# Altium PCB Instrument_droid.PcbDoc (part 2 of 2)
Units mil, origin at the board's own origin, x right, y up, seen from the top; angles counter-clockwise.
Board outline 3674.15 x 2121.53 mil, 4 copper layers (Layer1, Layer2, Layer3, Layer4), stack 23.756 mil thick; 87 components, 48 nets, 303 pads, 89 vias.
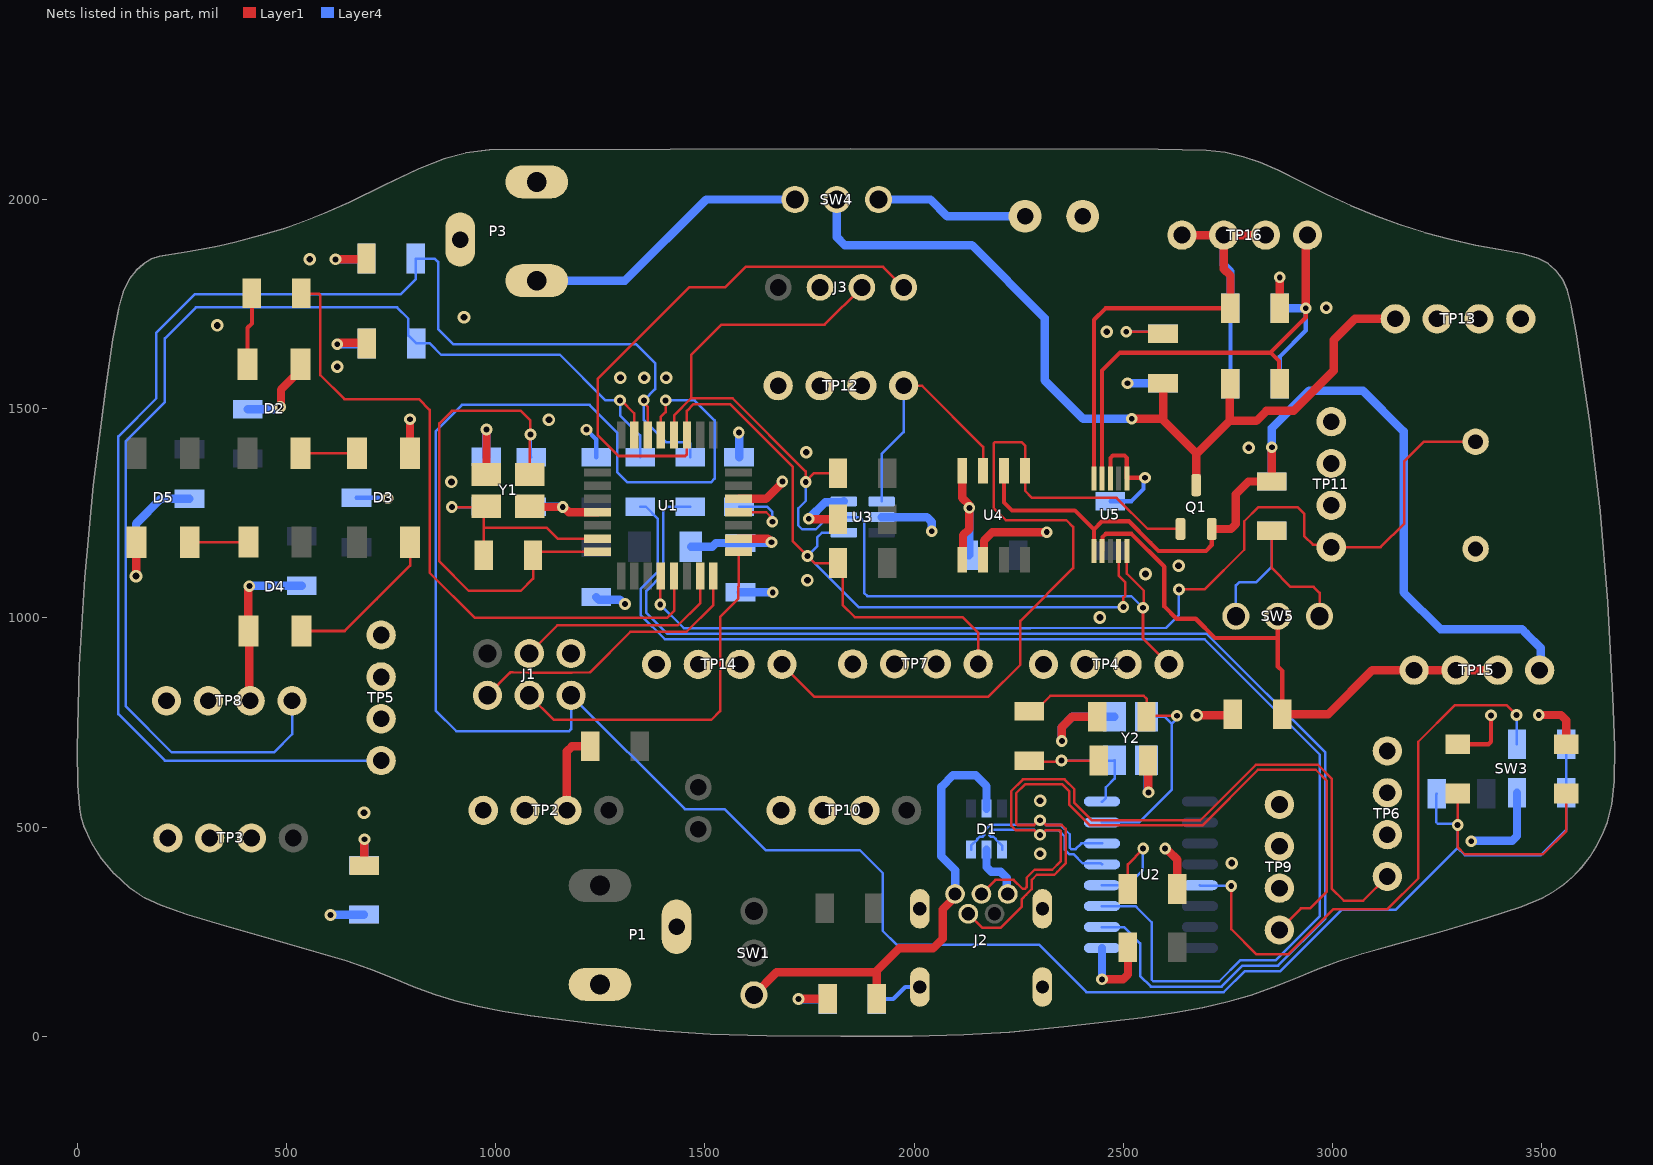
[diagram p4: the nets of this part, all layers, seen from the top]

## Via types
v1: diameter 28, hole 14, Layer1 to Layer4, 66 vias
v2: diameter 30, hole 16, Layer1 to Layer4, 23 vias

## Nets (pads, with @x,y where several pads share a name; then routed paths per layer and width w, separated by ;. In a path a pad name is that pad's centre, name@x,y a point inside that pad or via, vN(x,y) a via of type N, cw(c..) or ccw(c..) an arc to the next point about the centre after c; other vN are vias at no path point) (continued)
+AVCC: C12.2 L1.1 U1.18 | length 279.1
  Layer1 w20: U1.18@1580.43,1189.5 1650.5,1189.5 v1(1659,1181)
  Layer4 w20: L1.1@1466.5,1170 1517,1170 1526,1179 C12.2@1585,1179 1586,1180 1658,1180 v1(1659,1181)
+MOS_D: LED6.1 Q1.3 R15.2 SW4.2 TP13.1 | length 2155.1
  Layer1 w20: v1(2520,1476) 2595,1476 ; LED6.1@2595,1561 2595,1485 2595,1473 2674,1394 ; Q1.3@2674,1317.36 2674,1394 ; R15.2@2756,1560 2754,1558 2754,1471 ; TP13.1@3150,1715 3053.72,1715 3003,1664.28 3003,1591 2907,1495 2842,1495 2818,1471 2754,1471 ; 2674,1394 2677,1394 2754,1471
  Layer4 w20: SW4.2@1815,2000 1815,1910 1834,1891 2138,1891 2312,1717 2312,1568 2404,1476 v1(2520,1476)
+USB_VCC: D1.5 J2.1 LED1.1 SW1.3 | length 1209.1
  Layer1 w20: SW1.3@1617,99 1671,153 1911,153 LED1.1@1911,89.5 1911,157 1964,210 2045,210 2068,233 2068,303.09 2097.8,332.88 J2.1@2097.8,340.25
  Layer4 w20: J2.1@2097.8,340.25 2097.8,397.2 2065,430 2065,596 2093,624 2147,624 2173,598 D1.5@2173,544
+VDEVICE: P3.1 SW4.3 | length 697.4
  Layer4 w20: P3.1@1098,1806 1309,1806 1503,2000 SW4.3@1715,2000
+VLOAD: Q1.2 R16.2 R17.2 TP15.1 U4.2 U5.6 | length 2388.3
  Layer1 w10: U4.2@2215,1351.3 2215,1276.21 2234.21,1257 2384,1257 2429.63,1211.37 ; U5.6@2429.63,1160 2429.63,1211.37 ; Q1.2@2711.4,1212.64 2711.4,1174.12 2697.28,1160 2584.22,1160 2564.11,1180.11 2513.22,1231 2449.26,1231 2429.63,1211.37
  Layer1 w20: Q1.2@2711.4,1212.64 2757.28,1212.64 2769,1224.35 2769,1296 2799,1326 R17.2@2855,1326 v1(2855,1408)
  Layer4 w20: R16.2@2855,1326 v1(2855,1408) 2855,1454 2944,1543 3073,1543 3170,1446 3170,1061 3258,973 3453,973 3462.97,963.03 3497.72,928.28 3497.72,877.72 TP15.1@3495,875
+VTERMINAL: P2.1 SW4.1 | length 366.6
  Layer4 w20: SW4.1@1915,2000 2039,2000 2079,1960 P2.1@2265,1960
+VTH: R15.1 R18.2 R19.2 TP16.1 U5.4 | length 1346.7
  Layer1 w10: U5.4@2449.32,1333.23 2449.32,1591.32 2492,1634 2852,1634 ; R15.1@2874,1560 2872.22,1561.78 2872.22,1613.78 2852,1634 ; v1(2936,1740) 2935.89,1739.89 2935.89,1717.89 2913,1695 2852,1634
  Layer1 w20: v1(2936,1740) 2936,1911 TP16.1@2940,1915
  Layer4 w10: R18.2@2874,1560 2874,1625 2936,1687 v1(2936,1740)
  Layer4 w20: R19.2@2874,1740 v1(2936,1740)
-VLOAD: R20.2 SW5.2 TP15.2 U5.7 | length 1411.4
  Layer1 w10: U5.7@2449.32,1160 2450.22,1160.91 2450.22,1193.03 2458.12,1200.94 2519.25,1200.94 2598,1122.18 2598,1027 2626.97,998.03 2672.97,998.03 2719,952 2869,952 ; SW5.2@2869,1004 2869,952 ; R20.2@2880,770 2880,873 2869,884 2869,952
  Layer1 w20: R20.2@2880,770 2990,770 3095,875 TP15.2@3195,875 TP15.2@3295,875 TP15.2@3395,875
-VTH: R18.1 R19.1 R21.2 TP16.2 U5.5 | length 1441.4
  Layer1 w10: U5.5@2429.63,1352.17 2429.63,1712.63 2457,1740 R21.2@2756,1740
  Layer1 w20: TP16.2@2640,1915 TP16.2@2740,1915 ; R21.2@2756,1740 2756,1818 2740,1834 TP16.2@2740,1915 ; TP16.2@2840,1915 TP16.2@2740,1915
  Layer4 w10: R18.1@2756,1560 R19.1@2756,1740
  Layer4 w20: TP16.2@2740,1915 2740,1844 2756,1828 R19.1@2756,1740
AD4/SDA: J3.4 R12.1 TP7.1 U1.27 U3.4 U5.9 | length 3567.6
  Layer1 w6: J3.4@1975,1790 1926,1839 1597,1839 1548,1790 1462,1790 1243.39,1571.39 1243.39,1437 1293.39,1387 1452.49,1387 1456,1390.51 1456,1436.01 U1.27@1457,1437.01 1457,1495 1473,1511 1560,1511 1710,1361 1710,1183 v1(1745,1148) 1762,1131 R12.1@1818,1131 1829,1120 1829,1031 1858,1002 2116,1002 2153,965 TP7.1@2153,890 ; U5.9@2488.68,1160 2488.68,1101.32 2505,1085 2505,1054 2500,1049 v1(2500,1026)
  Layer4 w6: U3.4@1831.92,1203.6 1779.6,1203.6 1768,1192 1768,1171 v1(1745,1148) 1867,1026 v1(2500,1026)
AD5/SCL: J3.3 R13.1 TP4.1 U1.28 U3.5 U5.10 | length 2596.3
  Layer1 w6: U1.28@1426,1437.01 1426,1484 1467,1525 ; R13.1@1818,1346 1761,1346 1741,1326 v1(1741,1325) 1740.52,1325.48 1740.52,1350.28 1565.8,1525 1467,1525 ; J3.3@1875,1790 1786,1701 1540,1701 1467,1628 1467,1525 ; U5.10@2508.37,1160 2508.37,1105.63 2549,1065 2549,1026 v1@2547.06,1024.06 ; v1(2546.86,1024.26) 2547,1024.12 2547,951 TP4.1@2609,889
  Layer4 w6: v1(1741,1325) 1741,1280 1723,1262 1723,1221 1732,1212 1765,1212 1794,1241 U3.5@1831.92,1241 1870,1241 1880.39,1230.61 1880.39,1059.61 1888,1052 2519,1052 2546.74,1024.26 v1(2546.86,1024.26)
AREF: C9.2 U1.20 | length 202.5
  Layer1 w6: U1.20@1580.43,1252.5 1646.5,1252.5 1661,1238 v1(1661,1230)
  Layer4 w6: C9.2@1581.5,1266 1648,1266 1661,1253 v1(1661,1230)
CXTAL1: C4.2 R2.1 U2.7 Y2.1 | length 863.9
  Layer1 w6: R2.1@2275,777 2288.5,777 2325.5,814 2548.41,814 2555.38,807.04 C4.2@2555.38,763.94 2557.44,766 v1(2628,766)
  Layer4 w6: U2.7@2449,511 2537,511 2616,590 2616,746 ; Y2.1@2555.38,763.94 2598.06,763.94 2616,746 ; v1(2628,766) 2628,760.05 2616,748.05 2616,746
CXTAL2: C6.2 R2.2 U2.8 Y2.3 | length 407.9
  Layer1 w6: R2.2@2275,659 2278,656 2349,656 v1(2352,659) C6.2@2441,659
  Layer4 w6: v1(2352,659) 2478,659 Y2.3@2479,660 2479,616 2458.24,595.24 2458.24,569.31 2449.93,561 U2.8@2449,561
D+: D1.1 J2.3 TP6.1 U2.5 | length 2270.9
  Layer1 w6: J2.3@2160.78,340.25 2194.41,373.88 2237.7,373.88 2259.54,352.04 2264.51,352.04 2269,356.53 2269,379 2288,398 2330,398 2350,418 2350,490.9 2347.9,493 2315.51,493 2304.01,481.5 v1(2301,481.5) 2297.99,481.5 2286.49,493 2242.54,493 2232,503.54 2232,585.97 2260.03,614 2359.46,614 2383,590.46 2383,557.97 2424.97,516 2683.86,516 2816.86,649 2964.97,649 2998,615.97 2998,353 3027,324 3073,324 TP6.1@3131,382
  Layer4 w6: D1.1@2210,446 2210,455.5 2195,470.5 2195,471.64 2189.14,477.5 2182.51,477.5 2179,481.01 2179,485.99 2186.37,493.35 2286.49,493.35 2298.34,481.5 2304.01,481.5 2315.51,493 2345,493 2360,478 2360,446.09 2370.54,435.54 2380.46,435.54 2402.5,413.5 2446.5,413.5 U2.5@2449,411
D-: D1.3 J2.2 TP9.1 U2.6 | length 2321.8
  Layer1 w6: J2.2@2129.28,292.86 2162.91,259.24 2206.2,259.24 2257.4,310.44 2257.4,327.96 2268.02,338.58 2281,351.56 2281,374.03 2292.97,386 2334.97,386 2342,393.03 2354.97,406 2362,413.03 2362,495.87 2352.87,505 2315.51,505 2304.01,516.5 v1(2301,516.5) 2297.99,516.5 2286.49,505 2247.51,505 2244,508.51 2244,581 2265,602 2354.49,602 2371,585.49 2371,553 2396,528 2420,504 2688.83,504 2821.83,637 2960,637 2986,611 2986,345 2946.62,305.62 2924.62,305.62 TP9.1@2873,254
  Layer4 w6: D1.3@2136,446 2136,455.5 2151,470.5 2151,471.64 2156.86,477.5 2163.49,477.5 2167,481.01 2167,490.96 2181.4,505.35 2286.49,505.35 2295.13,514 2298.5,514 v1(2301,516.5) 2304.01,516.5 2315.51,505 2349.97,505 2372,482.97 2372,451.06 2375.51,447.54 2386.06,447.54 2399.51,461 U2.6@2449,461
DAC_OUT: TP12.1 U3.1 U4.3 | length 606.7
  Layer1 w6: TP12.1@1975,1555 2019,1555 2165,1409 U4.3@2165,1351.3
  Layer4 w6: U3.1@1922.08,1278.4 1922.08,1391.31 1975,1444.23 TP12.1@1975,1555
DTR: C7.2 U2.13 | length 1402.8
  Layer1 w6: v1(2758,359) 2758,256 2817.51,196.49 2895.2,196.49 3002.72,304 3131.54,304 3205,377.46 3205,704 3292,791 3417,791 v1(3440,768)
  Layer4 w6: U2.13@2683,361 2684,360 2757,360 v1(2758,359) ; v1(3440,768) 3440.84,767.16 C7.2@3440.84,698.11
GND: BZ1.2 C1.1 C3.1 C4.1 C5.1 C6.1 C8.1 C9.1 C10.1 C11.1 C12.1 C13.1 C14.1 C15.1 C16.1 C17.1 C18.1 C19.1 C20.1 C21.1 D1.2 D2.3 D3.3 D4.3 D5.3 J1.6 J2.5 J2.6 J2.7 J2.8 J2.9 J3.2 P1.2 P1.3 P2.2 P3.2 P3.3 R4.1 R5.1 R14.1 R20.1 R21.1 SW3.3 SW3.4 TP2.2 TP3.2 TP4.2 TP5.2 TP6.2 TP7.2 TP8.2 TP9.2 TP10.2 TP11.2 TP12.2 TP13.2 TP14.2 U1.5 U1.21 U2.1 U3.2 U3.6 U4.4 U4.5 U4.6 U5.1 U5.3 Y1.2 Y1.4 Y2.2 Y2.4 | length 5176.3
  Layer1 w10: U5.3@2469,1333.23 2469,1382.14 2474.86,1388 2502.51,1388 2508.37,1382.14 U5.1@2508.37,1333.23 2508.37,1334.09 2509.28,1335 v1(2552,1335) ; SW3.4@3299,698.11 3373.11,698.11 3379,704 v1(3379,767)
  Layer1 w20: v2(140,1100) 140.75,1100.75 140.75,1180.35 D5.3@141.5,1181.1 ; v1(411,1076) 408.5,1073.5 D4.3@408.5,968.7 410.75,966.45 410.75,804.25 TP8.2@413,802 ; v1(485,1504) 486.53,1505.53 486.53,1545.68 533.5,1592.65 D2.3@533.5,1606.3 ; D3.3@795,1393.7 v1(795,1475) ; Y1.4@977.53,1343.22 977.9,1343.58 v1(977.9,1450.27) ; Y1.2@1081.47,1266.84 1083.31,1265 v1(1160,1265) 1162.16,1265 1174.66,1252.5 U1.5@1243.43,1252.5 ; TP2.2@1170,540 1170,681.28 1181.72,693 C1.1@1226,693 ; U1.21@1580.43,1284.5 1645.5,1284.5 1685,1324 v1(1685,1326) ; v1(1748,1237) 1749,1236 C18.1@1818,1236 ; U4.5@2115,1138.7 2116.81,1140.51 2116.81,1197.81 2132,1213 v1(2132,1263) 2132,1270 2115,1287 U4.4@2115,1351.3 ; U4.6@2165,1138.7 2166.81,1140.51 2166.81,1184.81 2187,1205 v1(2317,1205) ; v1(2353,706) 2353,739 2377.94,763.94 C4.1@2437.38,763.94 ; v1(2449,136) 2499.28,136 2511,147.72 C13.1@2511,213 ; TP4.2@2509,887.39 TP4.2@2509,889 ; C6.1@2559,659 2559.5,658.5 2559.5,583.5 v1(2560,583) ; v1(2600,449) 2605,444 2607,444 2629,422 C14.1@2629,352 ; v2(2676,767) 2759,767 R20.1@2762,770 ; R21.1@2874,1740 v1(2874,1814) ; v1(3493,768) 3546,768 3558.84,755.16 SW3.3@3558.84,698.11
  Layer4 w10: C17.1@667,1287 741,1287 v1(742,1286) ; v1(1217,1450) 1240,1427 C10.1@1240,1384 ; R4.1@1911,89 1950,89 1978.75,117.75 J2.8@2013.55,117.75 ; C20.1@2469,1279 2519.5,1279 2548.56,1308.06 2548.56,1331.56 v1(2552,1335)
  Layer4 w20: v2(140,1100) 140,1225 200,1285 C21.1@268,1285 ; C15.1@407,1499 477.84,1499 482.84,1504 v1(485,1504) ; v1(411,1076) 411.5,1076.5 535.5,1076.5 C16.1@536,1077 ; v1(605,290) 605.5,290.5 684.5,290.5 R5.1@685,291 ; C3.1@977.53,1384.84 977.53,1447.47 975,1450 975.27,1450.27 v1(977.9,1450.27) ; C5.1@1085,1266 1085.5,1265.5 1159.5,1265.5 v1(1160,1265) ; C11.1@1240,1050 1246.64,1043.36 1296.48,1043.36 1306.84,1033 v1(1309,1033) ; v1(1581,1443) 1581.5,1442.5 C9.1@1581.5,1384 ; C12.1@1585,1061 v1(1662,1061) ; v1(1748,1237) 1787.79,1276.79 1830.31,1276.79 U3.6@1831.92,1278.4 ; U3.2@1922.08,1241 2030.28,1241 2042,1229.28 v1(2042,1207) ; C19.1@2131,1150 2131.5,1150.5 2131.5,1262.5 v1(2132,1263) ; D1.2@2173,446 2173,404.72 2184.72,393 2207,393 2221,379 2221,343.03 J2.5@2223.78,340.25 ; v1(2353,706) 2353,739 2377.94,763.94 Y2.4@2479,763.94 ; v1(2449,136) U2.1@2449,211 ; TP4.2@2509,881 TP4.2@2509,889 ; v1(2510,1561) R14.1@2595,1561 ; Y2.2@2555.38,660 2558.47,656.91 2558.47,584.53 v1(2560,583) ; v1(3331.53,466.09) 3332.44,467 3429.28,467 3441,478.72 C8.1@3441,581.89
  other v2: 2759,414 2301,436 685,534 2301,563 2444,1001 1745,1090 2553,1105 2632,1125 894,1325 1742,1396 2800,1407 1127,1474 1298,1574 1355,1574 1407,1574 621,1600 2460,1684 334,1699 924,1719 2985,1741 555,1857
IO0: R8.1 R10.1 TP5.1 U1.30 | length 3515.8
  Layer1 w6: v1(1354,1520) 1354,1514.05 1363,1505.05 U1.30@1363,1437.01
  Layer4 w6: TP5.1@726,659 209,659 98,770 98,1434 189,1525 189,1682 281,1774 773,1774 809,1810 R10.1@809,1859 854,1859 862,1851 862,1691 899,1654 1336,1654 1381,1609 1381,1547 v1(1354,1520) 1354,1473 1407,1420 1461.49,1420 1465,1416.49 R8.1@1465,1384
IO1: R9.1 R11.1 TP8.1 U1.31 | length 2951.5
  Layer1 w6: v1(1297,1520) 1300,1520 1331,1489 U1.31@1331,1437.01
  Layer4 w6: TP8.1@513,802 513,722 469.49,678.49 225.51,678.49 115,789 115,1422 209,1516 209,1668 283,1742 764,1742 791,1715 791,1675 R11.1@810,1656 842.5,1656 869.5,1629 1153,1629 1262,1520 v1(1297,1520) ; v1@1297,1523 1297,1484.02 1345,1436.02 R9.1@1345,1384
IO8: BZ1.1 TP11.1 U1.12 | length 2498.4
  Layer1 w6: v1(1393,1032) 1393,1099 U1.12@1394,1100 ; v1(2633,1068) 2694,1068 2789,1163 2789,1231 2823,1265 2916,1265 2933,1248 2933,1195 2953,1175 2991,1175 TP11.1@2997,1169 3115,1169 3172,1226 3172,1375 3217.95,1420.95 BZ1.1@3342,1420.95
  Layer4 w6: v1(1393,1032) 1449.21,975.79 2277.19,975.79 2278.03,974.95 2603,977 2604.76,978.76 2633,1007 v1(2633,1068)
IO9: R6.2 U1.13 | length 1649.2
  Layer1 w6: R6.2@541.18,1795.82 541.18,1787.33 554,1774.51 577.49,1774.51 581,1771 581,1580 638,1523 816,1523 842,1497 842,1108 950,1000 1409,1000 1426,1017 U1.13@1426,1100
IO9-R: D2.4 R6.1 | length 174.1
  Layer1 w10: D2.4@406.5,1606.3 406.5,1693.5 417,1704 R6.1@417,1776
MISO: J1.1 U1.16 | length 698.6
  Layer1 w6: J1.1@980,815 1033.24,868.24 1035,870 1039.97,870 1078.83,869.01 ccw(c1080,915) 1080,869 1180,869 ccw(c1180,915) 1181.06,869.01 1225,870 1322,967 1456.2,967 1520,1030.8 U1.16@1520,1100
MOS_GATE: Q1.1 TP14.1 U4.1 | length 1975.4
  Layer1 w6: TP14.1@1684,889 1762,811 2177,811 2254,888 2254,993 2380,1119 2380,1217.49 2363.49,1234 2219,1234 2190,1263 2190,1416.49 2193.51,1420 2257,1420 2265,1412 U4.1@2265,1351.3 2265,1304 2282,1287 2484,1287 2558.36,1212.64 Q1.1@2636.6,1212.64
MOSI: J1.5 U1.15 | length 523.1
  Layer1 w6: J1.5@1080,915 1147,982 1435,982 1489,1036 U1.15@1489,1100
NetC14_2: C14.2 U2.4 | length 277.3
  Layer1 w6: C14.2@2511,352 2511,411 2547.37,447.37 v1(2547.37,449.08)
  Layer4 w6: U2.4@2449,361 2511,361 2546,396 2546,447.7 v1(2547.37,449.08)
NetD2_2: D2.2 D3.4 | length 134.5
  Layer1 w6: D2.2@533.5,1393.7 D3.4@668,1393.7
NetD3_2: D3.2 D4.4 | length 380.3
  Layer1 w6: D4.4@535.5,968.7 638.7,968.7 715,1045 795,1125 D3.2@795,1181.1
NetD4_2: D4.2 D5.4 | length 140.1
  Layer1 w6: D5.4@268.5,1181.1 408.3,1181.1 D4.2@408.5,1181.3
NetLED1_2: LED1.2 R4.2 | length 143.9
  Layer1 w20: v1(1723.55,88.88) 1723,89.43 1723,92 1725.5,89.5 LED1.2@1793,89.5
  Layer4 w20: v1(1723.55,88.88) 1792.88,88.88 R4.2@1793,89
NetLED2_2: LED2.2 R5.2 | length 129.6
  Layer1 w20: LED2.2@685.5,408 685.5,472.5 686,473 v1(686,471)
  Layer4 w20: R5.2@685,409 686,410 v1(686,471)
NetLED4_2: LED4.2 R10.2 | length 139.2
  Layer1 w20: v1(617,1857) 684,1857 LED4.2@686,1859
  Layer4 w20: v1(617,1857) 685,1857 R10.2@686,1856
NetLED5_2: LED5.2 R11.2 | length 145.3
  Layer1 w20: v1(621,1654) 623.16,1654 627.16,1658 690,1658 LED5.2@692,1656
  Layer4 w20: v1(621,1654) 690,1654 R11.2@692,1656
NetLED6_2: LED6.2 R14.2 | length 180.1
  Layer1 w6: v1(2507,1684) 2590,1684 LED6.2@2595,1679
  Layer4 w6: v1(2507,1684) 2590,1684 R14.2@2595,1679
NetR16_1: R16.1 SW5.3 | length 263.3
  Layer4 w6: SW5.3@2769,1004 2769,1077.49 2776.51,1085 2817,1085 2855,1123 R16.1@2855,1208
NetR17_1: R17.1 SW5.1 | length 283.4
  Layer1 w6: R17.1@2855,1208 2855,1119 2900,1074 2955,1074 2969,1060 SW5.1@2969,1004
RESET: C7.1 C8.2 J1.3 R7.1 SW3.1 SW3.2 U1.29 | length 6104.8
  Layer1 w6: U1.29@1394,1437.01 1394,1480 1406,1492 v1(1406,1520) ; SW3.2@3299,580 v1(3299,505) 3299,452 3316,435 3503,435 3558.84,490.84 SW3.1@3558.84,580
  Layer4 w6: v1(1406,1520) 1475,1520 1523,1472 1523,1333 1514,1324 1315,1324 1290,1349 1290,1443 1224,1509 919,1509 856,1446 856,779 906,729 1175,729 1180,734 J1.3@1180,815 1452,543 1547,543 1645,445 1870,445 1925,390 1925,252 1958,219 2298,219 2411.49,105.51 2740.07,105.51 2790.56,156 2875.41,156 3021.41,302 3151,302 3299,450 ; R7.1@3249,580 3248,579 3248,511.51 3251.51,508 3296,508 v1(3299,505) 3299,450 ; C7.1@3558.84,698.11 3559,697.95 C8.2@3559,581.89 3559,494 3498,433 3316,433 3299,450
RXD: R9.2 U2.3 | length 3188.6
  Layer4 w6: R9.2@1345,1266 1358.5,1266 1387,1237.5 1387,1110 1347,1070 1347,1006 1404.05,948.95 2694.05,948.95 2970,673 2970,287.36 2864.64,182 2779.79,182 2729.3,131.51 2571.51,131.51 2568,135.02 2568,272 2531.98,308.02 2529,311 U2.3@2449,311
SCK: J1.2 U1.17 | length 889
  Layer1 w6: J1.2@1080,815 1139,756 1515,756 1536,777 1536,1002 1580,1046 1580,1075 1580.43,1075.43 U1.17@1580.43,1158.5
TXD: R8.2 U2.2 | length 3192.4
  Layer4 w6: R8.2@1465,1266 1412,1266 1400,1254 1400,1104.62 1360,1064.62 1360,1012 1410.05,961.95 2699.43,961.95 2983,678.38 2983,281.98 2870.02,169 2785.18,169 2734.69,118.51 2566.11,118.51 2540.21,144.41 2540.21,222.1 2501.31,261 U2.2@2449,261
XTAL1: C3.2 R1.1 U1.7 Y1.1 | length 544.5
  Layer1 w6: v1(895,1265) 975.69,1265 Y1.1@977.53,1266.84 971,1260.31 971,1216 ; R1.1@971,1175 971,1216 ; U1.7@1243.43,1189.5 1147.55,1189.5 1121.06,1216 971,1216
  Layer4 w6: v1(895,1265) 975.69,1265 C3.2@977.53,1266.84
XTAL2: C5.2 R1.2 U1.8 Y1.3 | length 1233.5
  Layer1 w6: Y1.3@1081.47,1343.22 1081.47,1436.47 v1(1083.23,1438.23) 1082.24,1439.23 1082.24,1472.76 1060,1495 895,1495 865,1465 865,1135 935,1065 1060,1065 1089,1094 R1.2@1089,1150 1097.5,1158.5 U1.8@1243.43,1158.5
  Layer4 w6: v1(1083.23,1438.23) 1083.23,1385.77 C5.2@1085,1384
pads on no net: D1.4 D1.6 D5.2 J2.4 U1.1 U1.2 U1.3 U1.9 U1.10 U1.11 U1.14 U1.19 U1.22 U1.23 U1.24 U1.25 U1.26 U1.32 U2.9 U2.10 U2.11 U2.12 U2.14 U2.15 U4.7 U5.2

## Polygon pours and split planes (outlines as drawn)
GND on Layer2 "GND_L02_P000" (solid, pour order 0): 160,330.66 199.58,313.21 263.6,290.99 352.07,263.99 465,232.21 642.58,180.89 700.84,160.68 752.36,139.72 803.34,118.57 852.66,100.56 902.79,85.15 956.22,71.77 1015.42,59.87 1082.88,48.89 1252.5,27.46 1391.35,13.19 1512.74,4.79 1647.14,0.78 1825,-0.33 1995.1,0.28 2118.26,3.3 2227.92,10.17 2357.5,22.3 2545.57,44.15 2621.91,55.76 2689.23,68.4 2749.6,82.51 2805.1,98.52 2857.81,116.88 2909.81,138 2964.17,160.6 3014.99,179.34 3069.49,196.69 3134.88,215.13 3263.58,251.04 3370.75,283.18 3451.46,310.01 3500.79,329.98 3527.41,344.99 3552.14,362.38 3574.91,382.05 3595.63,403.91 3614.24,427.87 3630.64,453.83 3644.76,481.71 3656.52,511.41 3667.89,554.47 3673.56,609.46 3674.17,690.56 3670.39,812 3658.29,1037.81 3639.91,1254.87 3614.82,1467.52 3582.58,1680.09 3571.19,1743.81 3561.47,1783.35 3550.19,1808.68 3534.13,1829.72 3515.18,1847.28 3490.85,1860.04 3455.51,1870.17 3403.54,1879.83 3341.63,1891.21 3280.92,1904.95 3221.11,1921.16 3161.91,1939.95 3103.02,1961.41 3044.15,1985.65 2984.99,2012.76 2925.24,2042.85 2870.66,2070.42 2826.8,2089.44 2786.75,2102.58 2743.58,2112.47 2698.27,2117.81 2583.46,2120.56 1848.58,2121.2 985,2118.77 927.8,2111.27 875.82,2097.73 815.93,2073.73 735,2034.87 650.13,1993.94 590,1967.23 537.5,1946.33 492.28,1930.52 437.5,1914.25 376.25,1897.88 340,1889.87 328.66,1887.44 262.41,1875.04 196.16,1864.75 177.3,1858.28 158.46,1846.65 140.76,1830.71 125.32,1811.29 110.67,1783.11 98.24,1739.49 84.93,1666.32 67.62,1549.5 38.06,1317.04 16.95,1095.87 4.27,885.84 0.03,686.8 0.94,599.76 5.29,543.77 9.49,522.5 15.44,503.1 33.77,462 56.89,425.14 88.29,388.2 123.99,355.32
GND on Layer3 "GND_L03_P001" (solid, pour order 1): 160,330.66 199.58,313.21 263.6,290.99 352.07,263.99 465,232.21 642.58,180.89 700.84,160.68 752.36,139.72 803.34,118.57 852.66,100.56 902.79,85.15 956.22,71.77 1015.42,59.87 1082.88,48.89 1252.5,27.46 1391.35,13.19 1512.74,4.79 1647.14,0.78 1825,-0.33 1995.1,0.28 2118.26,3.3 2227.92,10.17 2357.5,22.3 2545.57,44.15 2621.91,55.76 2689.23,68.4 2749.6,82.51 2805.1,98.52 2857.81,116.88 2909.81,138 2964.17,160.6 3014.99,179.34 3069.49,196.69 3134.88,215.13 3263.58,251.04 3370.75,283.18 3451.46,310.01 3500.79,329.98 3527.41,344.99 3552.14,362.38 3574.91,382.05 3595.63,403.91 3614.24,427.87 3630.64,453.83 3644.76,481.71 3656.52,511.41 3667.89,554.47 3673.56,609.46 3674.17,690.56 3670.39,812 3658.29,1037.81 3639.91,1254.87 3614.82,1467.52 3582.58,1680.09 3571.19,1743.81 3561.47,1783.35 3550.19,1808.68 3534.13,1829.72 3515.18,1847.28 3490.85,1860.04 3455.51,1870.17 3403.54,1879.83 3341.63,1891.21 3280.92,1904.95 3221.11,1921.16 3161.91,1939.95 3103.02,1961.41 3044.15,1985.65 2984.99,2012.76 2925.24,2042.85 2870.66,2070.42 2826.8,2089.44 2786.75,2102.58 2743.58,2112.47 2698.27,2117.81 2583.46,2120.56 1848.58,2121.2 985,2118.77 927.8,2111.27 875.82,2097.73 815.93,2073.73 735,2034.87 650.13,1993.94 590,1967.23 537.5,1946.33 492.28,1930.52 437.5,1914.25 376.25,1897.88 340,1889.87 328.66,1887.44 262.41,1875.04 196.16,1864.75 177.3,1858.28 158.46,1846.65 140.76,1830.71 125.32,1811.29 110.67,1783.11 98.24,1739.49 84.93,1666.32 67.62,1549.5 38.06,1317.04 16.95,1095.87 4.27,885.84 0.03,686.8 0.94,599.76 5.29,543.77 9.49,522.5 15.44,503.1 33.77,462 56.89,425.14 88.29,388.2 123.99,355.32

## Keep-outs
Keep-Out Layer:
  lines w20: 0.03,686.8 4.27,885.84 ; 0.03,686.8 0.94,599.76 ; 0.03,686.8 0.94,599.76 ; 0.03,686.8 4.27,885.84 ; 0.94,599.76 5.29,543.77 ; 0.94,599.76 5.29,543.77 ; 4.27,885.84 16.95,1095.87 ; 4.27,885.84 16.95,1095.87 ; 5.29,543.77 9.49,522.5 ; 5.29,543.77 9.49,522.5 ; 9.49,522.5 15.44,503.1 ; 9.49,522.5 15.44,503.1 ; 15.44,503.1 33.77,462 ; 15.44,503.1 33.77,462 ; 16.95,1095.87 38.06,1317.04 ; 16.95,1095.87 38.06,1317.04 ; 33.77,462 56.89,425.14 ; 33.77,462 56.89,425.14 ; 38.06,1317.04 67.62,1549.5 ; 38.06,1317.04 67.62,1549.5 ; 56.89,425.14 88.29,388.2 ; 56.89,425.14 88.29,388.2 ; 67.62,1549.5 84.93,1666.32 ; 67.62,1549.5 84.93,1666.32 ; 84.93,1666.32 98.24,1739.49 ; 84.93,1666.32 98.24,1739.49 ; 88.29,388.2 123.99,355.32 ; 88.29,388.2 123.99,355.32 ; 98.24,1739.49 110.67,1783.11 ; 98.24,1739.49 110.67,1783.11 ; 110.67,1783.11 125.32,1811.29 ; 110.67,1783.11 125.32,1811.29 ; 123.99,355.32 160,330.66 ; 123.99,355.32 160,330.66 ; 125.32,1811.29 140.76,1830.71 ; 125.32,1811.29 140.76,1830.71 ; 140.76,1830.71 158.46,1846.65 ; 140.76,1830.71 158.46,1846.65 ; 158.46,1846.65 177.3,1858.28 ; 158.46,1846.65 177.3,1858.28 ; 160,330.66 199.58,313.21 ; 160,330.66 199.58,313.21 ; 177.3,1858.28 196.16,1864.75 ; 177.3,1858.28 196.16,1864.75 ; 196.16,1864.75 262.41,1875.04 ; 196.16,1864.75 262.41,1875.04 ; 199.58,313.21 263.6,290.99 ; 199.58,313.21 263.6,290.99 ; 262.41,1875.04 328.66,1887.44 ; 262.41,1875.04 328.66,1887.44 ; 263.6,290.99 352.07,263.99 ; 263.6,290.99 352.07,263.99 ; 328.66,1887.44 340,1889.87 ; 328.66,1887.44 340,1889.87 ; 340,1889.87 376.25,1897.88 ; 340,1889.87 376.25,1897.88 ; 352.07,263.99 465,232.21 ; 352.07,263.99 465,232.21 ; 376.25,1897.88 437.5,1914.25 ; 376.25,1897.88 437.5,1914.25 ; 437.5,1914.25 492.28,1930.52 ; 437.5,1914.25 492.28,1930.52 ; 465,232.21 642.58,180.89 ; 465,232.21 642.58,180.89 ; 492.28,1930.52 537.5,1946.33 ; 492.28,1930.52 537.5,1946.33 ; 537.5,1946.33 590,1967.23 ; 537.5,1946.33 590,1967.23 ; 590,1967.23 650.13,1993.94 ; 590,1967.23 650.13,1993.94 ; 642.58,180.89 700.84,160.68 ; 642.58,180.89 700.84,160.68 ; 650.13,1993.94 735,2034.87 ; 650.13,1993.94 735,2034.87 ; 700.84,160.68 752.36,139.72 ; 700.84,160.68 752.36,139.72 ; 735,2034.87 815.93,2073.73 ; 735,2034.87 815.93,2073.73 ; 752.36,139.72 803.34,118.57 ; 752.36,139.72 803.34,118.57 ; 803.34,118.57 852.66,100.56 ; 803.34,118.57 852.66,100.56 ; 815.93,2073.73 875.82,2097.73 ; 815.93,2073.73 875.82,2097.73 ; 852.66,100.56 902.79,85.15 ; 852.66,100.56 902.79,85.15 ; 875.82,2097.73 927.8,2111.27 ; 875.82,2097.73 927.8,2111.27 ; 902.79,85.15 956.22,71.77 ; 902.79,85.15 956.22,71.77 ; 927.8,2111.27 985,2118.77 ; 927.8,2111.27 985,2118.77 ; 956.22,71.77 1015.42,59.87 ; 956.22,71.77 1015.42,59.87 ; 985,2118.77 1848.58,2121.2 ; 985,2118.77 1848.58,2121.2 ; 1015.42,59.87 1082.88,48.89 ; 1015.42,59.87 1082.88,48.89 ; 1082.88,48.89 1252.5,27.46 ; 1082.88,48.89 1252.5,27.46 ; 1252.5,27.46 1391.35,13.19 ; 1252.5,27.46 1391.35,13.19 ; 1391.35,13.19 1512.74,4.79 ; 1391.35,13.19 1512.74,4.79 ; 1512.74,4.79 1647.14,0.78 ; 1512.74,4.79 1647.14,0.78 ; 1647.14,0.78 1825,-0.33 ; 1647.14,0.78 1825,-0.33 ; 1825,-0.33 1995.1,0.28 ; 1825,-0.33 1995.1,0.28 ; 1848.58,2121.2 2583.46,2120.56 ; 1848.58,2121.2 2583.46,2120.56 ; 1995.1,0.28 2118.26,3.3 ; 1995.1,0.28 2118.26,3.3 ; 2118.26,3.3 2227.92,10.17 ; 2118.26,3.3 2227.92,10.17 ; 2227.92,10.17 2357.5,22.3 ; 2227.92,10.17 2357.5,22.3 ; 2357.5,22.3 2545.57,44.15 ; 2357.5,22.3 2545.57,44.15 ; 2545.57,44.15 2621.91,55.76 ; 2545.57,44.15 2621.91,55.76 ; 2583.46,2120.56 2698.27,2117.81 ; 2583.46,2120.56 2698.27,2117.81 ; 2621.91,55.76 2689.23,68.4 ; 2621.91,55.76 2689.23,68.4 ; 2689.23,68.4 2749.6,82.51 ; 2689.23,68.4 2749.6,82.51 ; 2698.27,2117.81 2743.58,2112.47 ; 2698.27,2117.81 2743.58,2112.47 ; 2743.58,2112.47 2786.75,2102.58 ; 2743.58,2112.47 2786.75,2102.58 ; 2749.6,82.51 2805.1,98.52 ; 2749.6,82.51 2805.1,98.52 ; 2786.75,2102.58 2826.8,2089.44 ; 2786.75,2102.58 2826.8,2089.44 ; 2805.1,98.52 2857.81,116.88 ; 2805.1,98.52 2857.81,116.88 ; 2826.8,2089.44 2870.66,2070.42 ; 2826.8,2089.44 2870.66,2070.42 ; 2857.81,116.88 2909.81,138 ; 2857.81,116.88 2909.81,138 ; 2870.66,2070.42 2925.24,2042.85 ; 2870.66,2070.42 2925.24,2042.85 ; 2909.81,138 2964.17,160.6 ; 2909.81,138 2964.17,160.6 ; 2925.24,2042.85 2984.99,2012.76 ; 2925.24,2042.85 2984.99,2012.76 ; 2964.17,160.6 3014.99,179.34 ; 2964.17,160.6 3014.99,179.34 ; 2984.99,2012.76 3044.15,1985.65 ; 2984.99,2012.76 3044.15,1985.65 ; 3014.99,179.34 3069.49,196.69 ; 3014.99,179.34 3069.49,196.69 ; 3044.15,1985.65 3103.02,1961.41 ; 3044.15,1985.65 3103.02,1961.41 ; 3069.49,196.69 3134.88,215.13 ; 3069.49,196.69 3134.88,215.13 ; 3103.02,1961.41 3161.91,1939.95 ; 3103.02,1961.41 3161.91,1939.95 ; 3134.88,215.13 3263.58,251.04 ; 3134.88,215.13 3263.58,251.04 ; 3161.91,1939.95 3221.11,1921.16 ; 3161.91,1939.95 3221.11,1921.16 ; 3221.11,1921.16 3280.92,1904.95 ; 3221.11,1921.16 3280.92,1904.95 ; 3263.58,251.04 3370.75,283.18 ; 3263.58,251.04 3370.75,283.18 ; 3280.92,1904.95 3341.63,1891.21 ; 3280.92,1904.95 3341.63,1891.21 ; 3341.63,1891.21 3403.54,1879.83 ; 3341.63,1891.21 3403.54,1879.83 ; 3370.75,283.18 3451.46,310.01 ; 3370.75,283.18 3451.46,310.01 ; 3403.54,1879.83 3455.51,1870.17 ; 3403.54,1879.83 3455.51,1870.17 ; 3451.46,310.01 3500.79,329.98 ; 3451.46,310.01 3500.79,329.98 ; 3455.51,1870.17 3490.85,1860.04 ; 3455.51,1870.17 3490.85,1860.04 ; 3490.85,1860.04 3515.18,1847.28 ; 3490.85,1860.04 3515.18,1847.28 ; 3500.79,329.98 3527.41,344.99 ; 3500.79,329.98 3527.41,344.99 ; 3515.18,1847.28 3534.13,1829.72 ; 3515.18,1847.28 3534.13,1829.72 ; 3527.41,344.99 3552.14,362.38 ; 3527.41,344.99 3552.14,362.38 ; 3534.13,1829.72 3550.19,1808.68 ; 3534.13,1829.72 3550.19,1808.68 ; 3550.19,1808.68 3561.47,1783.35 ; 3550.19,1808.68 3561.47,1783.35 ; 3552.14,362.38 3574.91,382.05 ; 3552.14,362.38 3574.91,382.05 ; 3561.47,1783.35 3571.19,1743.81 ; 3561.47,1783.35 3571.19,1743.81 ; 3571.19,1743.81 3582.58,1680.09 ; 3571.19,1743.81 3582.58,1680.09 ; 3574.91,382.05 3595.63,403.91 ; 3574.91,382.05 3595.63,403.91 ; 3582.58,1680.09 3614.82,1467.52 ; 3582.58,1680.09 3614.82,1467.52 ; 3595.63,403.91 3614.24,427.87 ; 3595.63,403.91 3614.24,427.87 ; 3614.24,427.87 3630.64,453.83 ; 3614.24,427.87 3630.64,453.83 ; 3614.82,1467.52 3639.91,1254.87 ; 3614.82,1467.52 3639.91,1254.87 ; 3630.64,453.83 3644.76,481.71 ; 3630.64,453.83 3644.76,481.71 ; 3639.91,1254.87 3658.29,1037.81 ; 3639.91,1254.87 3658.29,1037.81 ; 3644.76,481.71 3656.52,511.41 ; 3644.76,481.71 3656.52,511.41 ; 3656.52,511.41 3667.89,554.47 ; 3656.52,511.41 3667.89,554.47 ; 3658.29,1037.81 3670.39,812 ; 3658.29,1037.81 3670.39,812 ; 3667.89,554.47 3673.56,609.46 ; 3667.89,554.47 3673.56,609.46 ; 3670.39,812 3674.17,690.56 ; 3670.39,812 3674.17,690.56 ; 3673.56,609.46 3674.17,690.56 ; 3673.56,609.46 3674.17,690.56

## Silkscreen, mask and mechanical layers (free items; w line width, h text height)
Top Overlay:
  drawing of 263 lines, arcs and shapes, not listed
  text "+VTH" at 2588,2038 h40
  text "GND" at 1724,1868 h40
  text "SCL" at 1862,1868 h40
  text "SDA" at 1997,1866 h40
  text "VCC" at 1585,1865 h40
  text "DRAIN" at 3096,1800 h40
  text "DAC_OUT" at 1949,1641.66 h40
  text "DRAIN" at 2327,1606 h40
  text "IO8" at 3075,1091 h40
  text "ICSP" at 1059,1000 h40
  text "+VLOAD" at 3342,995 h40
  text "SCL" at 2575,976 h40
  text "IO1" at 215,933 h40
  text "GATE" at 1590,772 h40
  text "SDA" at 2067,767 h40
  text "5/USB" at 1853,665 h40
  text "5-SENSE" at 818,660 h40
  text "IO0" at 546,634 h40
  text "+5V" at 396,604 h40
  text "D+" at 3215,362 h40
  text "+5V" at 762,283 h40
  text "D-" at 2711,232 h40
Bottom Overlay:
  text "INSTRUMENT DROID" at 1830,1855 h40
  text "ECEN5730" at 2246,1852 h40
  text "RUBAN FORD  ,  13-11-2025" at 2243,1668.33 h40
  text "CU BOULDER , ECEN" at 2385,974.33 h40
  text "ECEN5730_BRD4A" at 2206,718.66 h40
Mechanical 2:
  drawing of 199 lines, arcs and shapes, not listed
Mechanical 15:
  lines w10: 1295,690 2365,690 2365,1790 1295,1790 1295,690